# Altium PCB 175-00002 rev 2, PCB, Sinistro Clock Gen.PcbDoc (part 2 of 6)
Units mil, origin at the board's own origin, x right, y up, seen from the top; angles counter-clockwise.
Board outline 5905.51 x 4330.71 mil, 10 copper layers (Top Layer (.GTL), MidLayer1 (*.G1), +12V (*.GP1), -12V (*.GP2), A & GND (*.GP3), Chassis E (*.GP4), +28V & VCC (*.GP5), MidLayer2 (*.G2), MidLayer3 (*.G3), Bottom Layer (.GBL)), stack 64.6 mil thick; 495 components, 327 nets, 1939 pads, 938 vias.
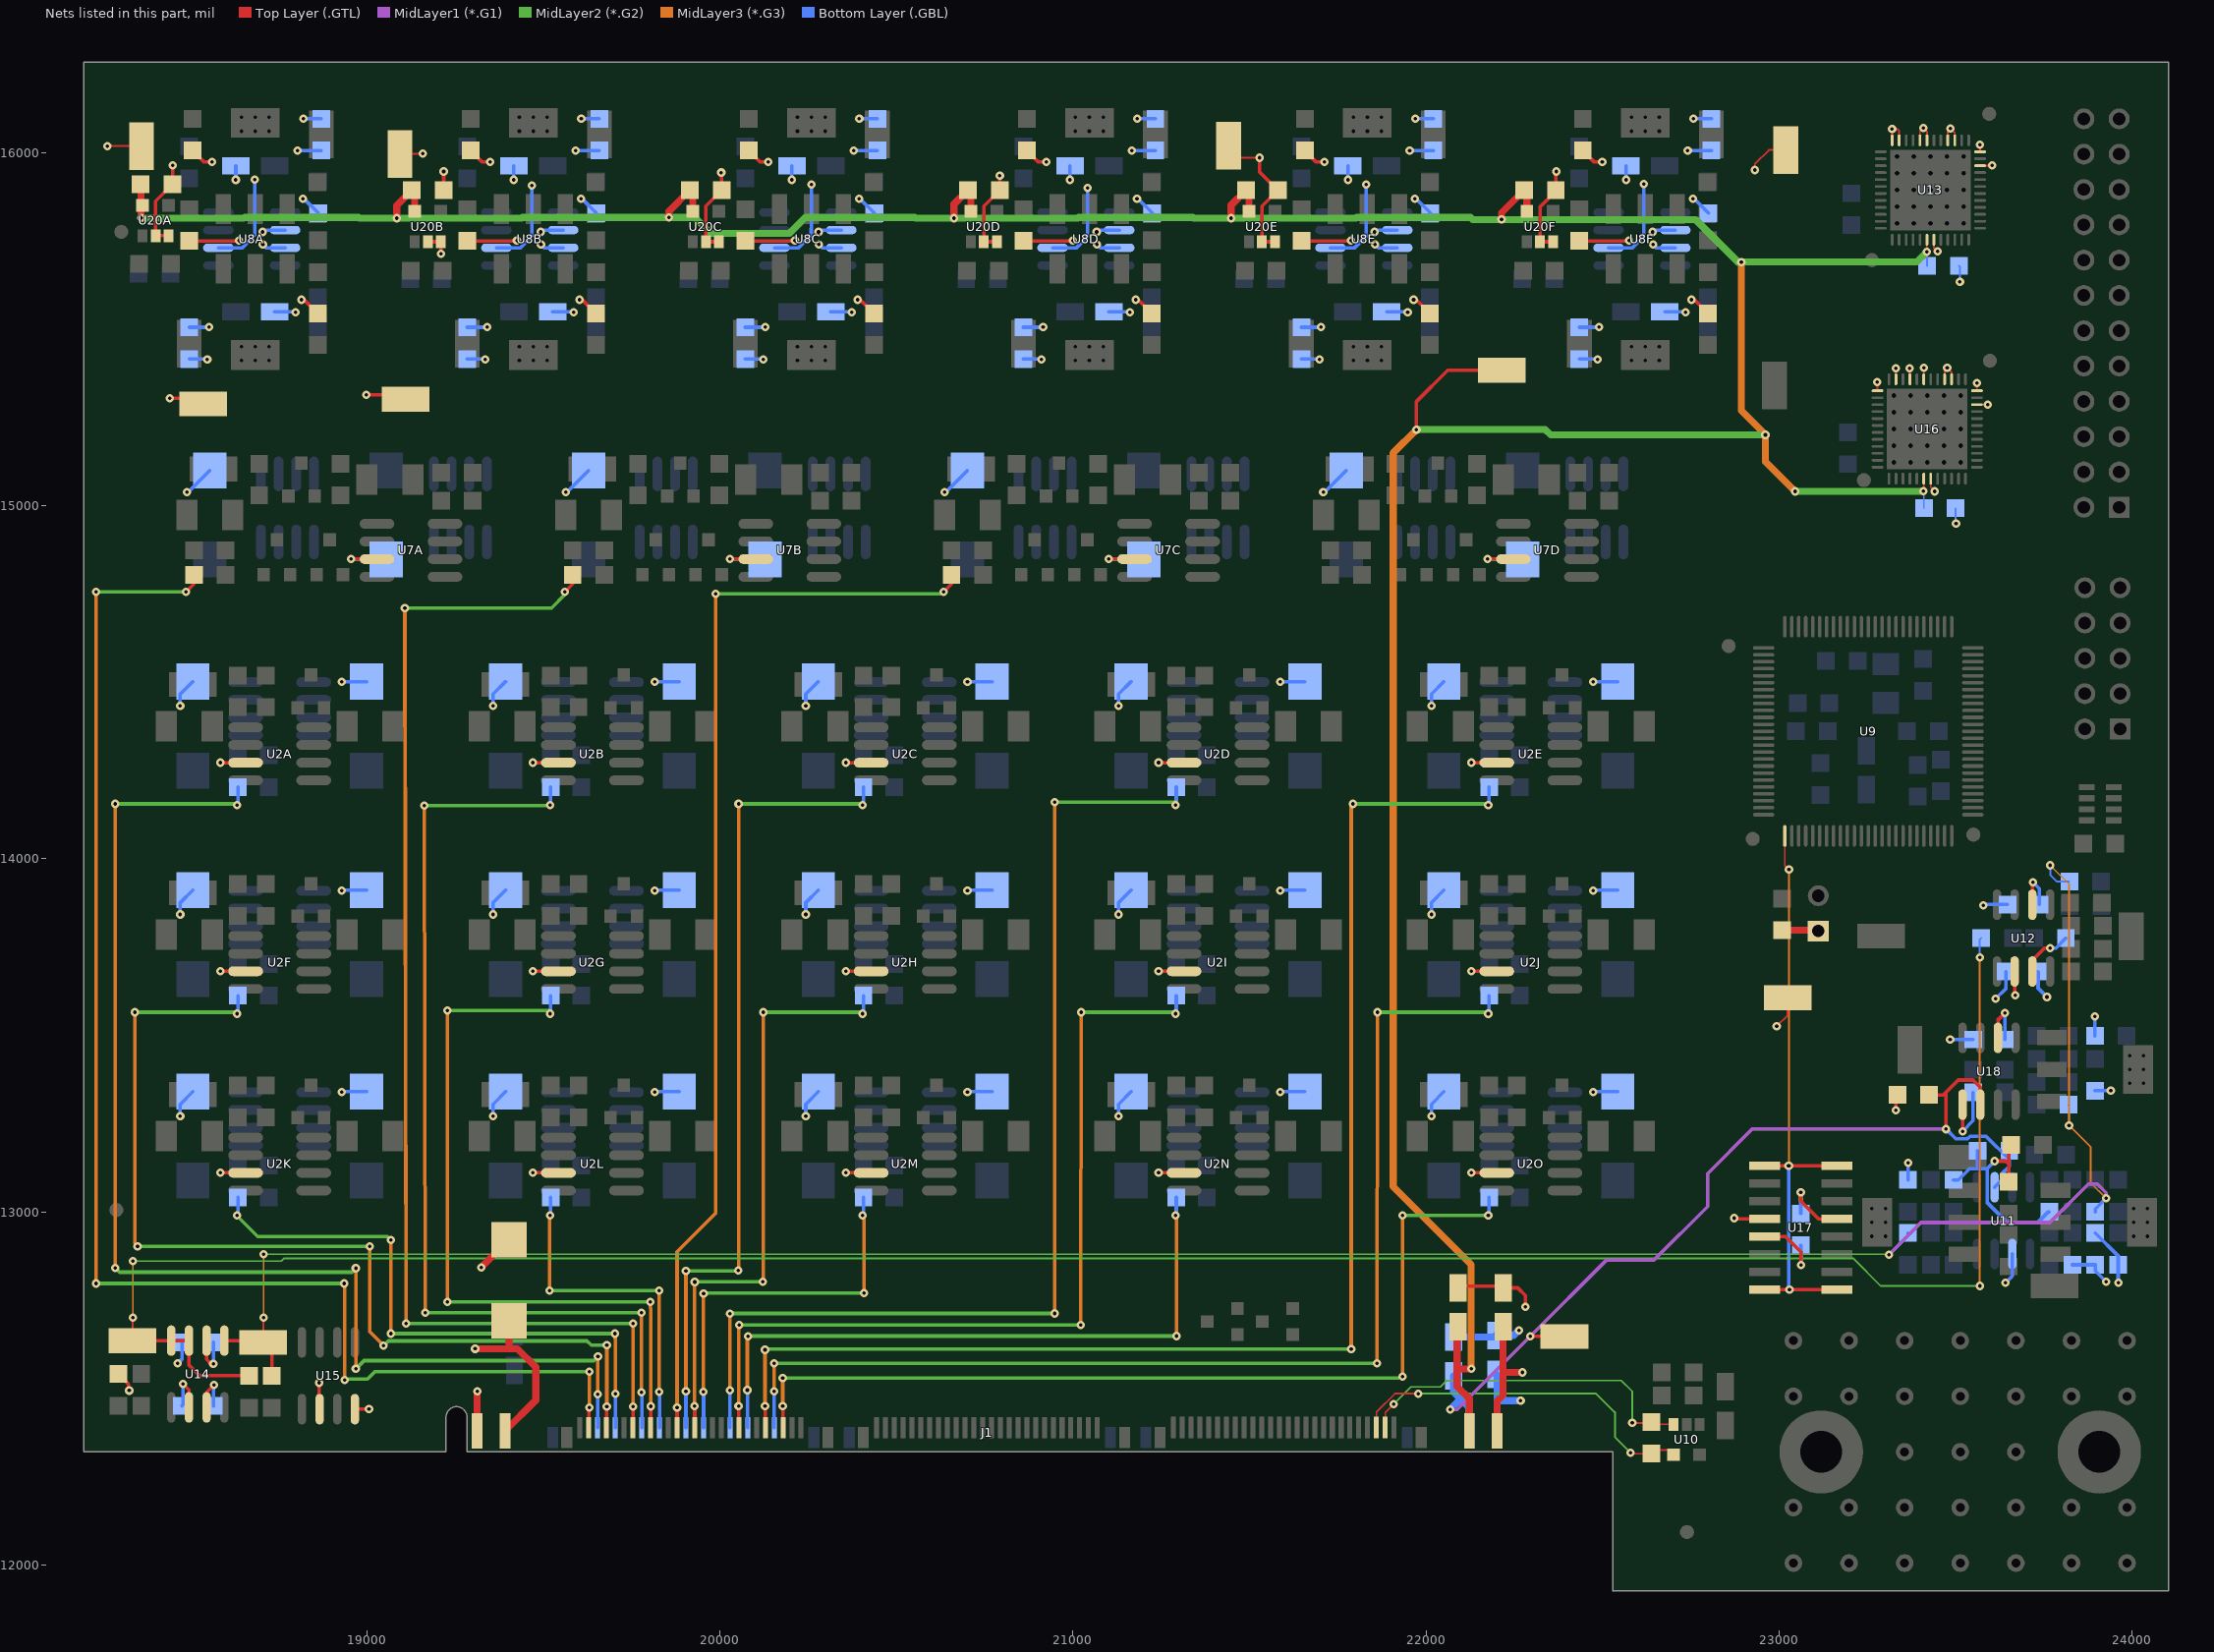
[diagram p10: the nets of this part, all layers, seen from the top]

## Components (designator, comment, footprint, x,y, rotation, side; value= is the part's Value field where it differs from the comment) (continued)
U8F "LT1124CS8" S8_N 22611.46,15755.04 r180 bottom (schematic designator U8)
U9 "EPM240T100C3" TQFP100_L 23252.41,14360.63 r0 top
U10 "FIN1002M5" SMD_SOT23_5 22738,12355 r0 top
U11 "LT1124CS8" S8_N 23635.21,12974.92 r270 bottom
U12 "LT1124CS8" S8_N 23692,13775 r90 top
U13 "MAX1258" QFN48_M 23334,15799 r0 top
U14 "LT1124CS8" S8_N 18521.46,12540.51 r90 top
U15 "REF02AU" 182H_N 18891.46,12535.51 r90 top
U16 "MAX1258" QFN48_M 23325,15122.26 r0 top
U17 "DG202" SOIC16 23061.31,12955 r270 top
U18 "LT1124CS8" S8_N 23594.46,13397.84 r90 top
U19 "DS2411" SMD_SOT23_3 21423,12689 r90 top
U20A "AD8605" SMD_SOT23_5 18402,15807 r180 top (schematic designator U20)
U20B "AD8605" SMD_SOT23_5 19173,15790 r180 top (schematic designator U20)
U20C "AD8605" SMD_SOT23_5 19960.4,15790 r180 top (schematic designator U20)
U20D "AD8605" SMD_SOT23_5 20747.8,15790 r180 top (schematic designator U20)
U20E "AD8605" SMD_SOT23_5 21535.2,15790 r180 top (schematic designator U20)
U20F "AD8605" SMD_SOT23_5 22322.61,15790 r180 top (schematic designator U20)

## Footprints (in the part's own frame and the unit in brackets; to place one, negate y for a bottom-side part, rotate by r counter-clockwise, add the part's x,y. Pads: shape width x height; smd on the part's side, far side on the other; paste and mask are expansions set on the pad)
182H_M [mm] "8-Pin Small Outline Integrated Circuit 1.27 mm Pitch, IPC Low Density"
  oval 2.5x0.7 smd: 1(-2.45,1.905) 2(-2.45,0.635) 3(-2.45,-0.635) 4(-2.45,-1.905) 5(2.45,-1.905) 6(2.45,-0.635) 7(2.45,0.635) 8(2.45,1.905)
  silkscreen extent -2.57,-2.5 0.8,2.93, body extent -2,-2.5 2,2.5, height 1.75
182H_N [mm] "8-Pin Small Outline Integrated Circuit 1.27 mm Pitch, IPC Medium Density"
  oval 2.2x0.6 smd: 1(-2.4,1.905) 2(-2.4,0.635) 3(-2.4,-0.635) 4(-2.4,-1.905) 5(2.4,-1.905) 6(2.4,-0.635) 7(2.4,0.635) 8(2.4,1.905)
  silkscreen extent -2.52,-2.5 0.9,2.88, body extent -1.95,-2.45 1.95,2.45, height 1.75
HDR1X2 [mm] "Connector; Header; 2 Position"
  rect 1.5x1.5 hole 0.9: 1(0,0)
  round 1.5 hole 0.9: 2(2.54,0)
  silkscreen extent -1.27,-1.27 3.81,1.27
HDR2X5 [mm] "Connector; Header; 5x2 Position"
  rect 1.5x1.5 hole 0.9: 1(0,0)
  round 1.5 hole 0.9: 2(0,2.54) 3(2.54,0) 4(2.54,2.54) 5(5.08,0) 6(5.08,2.54) 7(7.62,0) 8(7.62,2.54) 9(10.16,0) 10(10.16,2.54)
  silkscreen extent -1.27,-1.27 11.43,3.81
HDR2X12 [mm] "Connector; Header; 12x2 Position"
  rect 1.5x1.5 hole 0.9: 1(0,0)
  round 1.5 hole 0.9: 2(0,2.54) 3(2.54,0) 4(2.54,2.54) 5(5.08,0) 6(5.08,2.54) 7(7.62,0) 8(7.62,2.54) 9(10.16,0) 10(10.16,2.54) 11(12.7,0) 12(12.7,2.54) 13(15.24,0) 14(15.24,2.54) 15(17.78,0) 16(17.78,2.54) 17(20.32,0) 18(20.32,2.54) 19(22.86,0) 20(22.86,2.54) 21(25.4,0) 22(25.4,2.54) 23(27.94,0) 24(27.94,2.54)
  silkscreen extent -1.27,-1.27 29.21,3.81
QFN48_M [mm] "QFN, 48-Leads, Body 7x7mm, Pitch 0.5mm, IPC Low Density"
  round 0.66 hole 0.33 mask+0: 0(0,0)
  round 0.66 hole 0.33: 0(0,1.2) 0(0,3.6) 0(0,4.8) 0(1.2,0) 0(1.2,1.2) 0(1.2,2.4) 0(1.2,4.8) 0(2.4,0) 0(2.4,1.2) 0(2.4,2.4) 0(2.4,3.6) 0(2.4,4.8) 0(3.6,0) 0(3.6,1.2) 0(3.6,2.4) 0(3.6,3.6) 0(3.6,4.8) 0(4.8,0) 0(4.8,1.2) 0(4.8,2.4) 0(4.8,3.6) 0(4.8,4.8)
  round 0.66 hole 0.33 paste+0 mask+0: 0(0,2.4) 0(1.2,3.6)
  rect 5.8x5.8 smd: 0(2.4,2.4)
  oval 0.85x0.2 smd: 1(-1.175,5.15) 2(-1.175,4.65) 3(-1.175,4.15) 4(-1.175,3.65) 5(-1.175,3.15) 6(-1.175,2.65) 7(-1.175,2.15) 8(-1.175,1.65) 9(-1.175,1.15) 10(-1.175,0.65) 11(-1.175,0.15) 12(-1.175,-0.35) 25(5.975,-0.35) 26(5.975,0.15) 27(5.975,0.65) 28(5.975,1.15) 29(5.975,1.65) 30(5.975,2.15) 31(5.975,2.65) 32(5.975,3.15) 33(5.975,3.65) 34(5.975,4.15) 35(5.975,4.65) 36(5.975,5.15)
  oval 0.2x0.85 smd: 13(-0.35,-1.175) 14(0.15,-1.175) 15(0.65,-1.175) 16(1.15,-1.175) 17(1.65,-1.175) 18(2.15,-1.175) 19(2.65,-1.175) 20(3.15,-1.175) 21(3.65,-1.175) 22(4.15,-1.175) 23(4.65,-1.175) 24(5.15,-1.175) 37(5.15,5.975) 38(4.65,5.975) 39(4.15,5.975) 40(3.65,5.975) 41(3.15,5.975) 42(2.65,5.975) 43(2.15,5.975) 44(1.65,5.975) 45(1.15,5.975) 46(0.65,5.975) 47(0.15,5.975) 48(-0.35,5.975)
  silkscreen extent -2.27,-1.2 6,6, body extent -1.17,-1.18 5.97,5.97, height 0.9
"QMS EDGE PWR PINS" [mil] "78 pos (156 pin) + 8 pwr pins"
  rect 60x14 smd mask+0: 0(69.15,-552.45) 1(69.15,-1152.45) 3(69.15,-1127.45) 5(69.15,-1102.45) 7(69.15,-1077.45) 9(69.15,-1052.45) 11(69.15,-1027.45) 13(69.15,-1002.45) 15(69.15,-977.45) 17(69.15,-952.45) 19(69.15,-927.45) 21(69.15,-902.45) 23(69.15,-877.45) 25(69.15,-852.45) 27(69.15,-827.45) 29(69.15,-802.45) 31(69.15,-777.45) 33(69.15,-752.45) 35(69.15,-727.45) 37(69.15,-702.45) 39(69.15,-677.45) 41(69.15,-652.45) 43(69.15,-627.45) 45(69.15,-602.45) 47(69.15,-577.45) 51(69.15,-527.45) 53(68.09,-312.11) 55(68.09,-287.11) 57(68.09,-262.11) 59(68.09,-237.11) 61(68.09,-212.11) 63(68.09,-187.11) 65(68.09,-162.11) 67(68.09,-137.11) 69(68.09,-112.11) 71(68.09,-87.11) 73(68.09,-62.11) 75(68.09,-37.11) 77(68.09,-12.11) 79(68.09,12.89) 81(68.09,37.89) 83(68.09,62.89) 85(68.09,87.89) 87(68.09,112.89) 89(68.09,137.89) 91(68.09,162.89) 93(68.09,187.89) 95(68.09,212.89) 97(68.09,237.89) 99(68.09,262.89) 101(68.09,287.89) 103(68.09,312.89) 105(68.09,528.05) 107(68.09,553.05) 109(68.09,578.05) 111(68.09,603.05) 113(68.09,628.05) 115(68.09,653.05) 117(68.09,678.05) 119(68.09,703.05) 121(68.09,728.05) 123(68.09,753.05) 125(68.09,778.05) 127(68.09,803.05) 129(68.09,828.05) 131(68.09,853.05) 133(68.09,878.05) 135(68.09,903.05) 137(68.09,928.05) 139(68.09,953.05) 141(68.09,978.05) 143(68.09,1003.05) 145(68.09,1028.05) 147(68.09,1053.05) 149(68.09,1078.05) 151(68.09,1103.05) 153(68.09,1128.05) 155(68.09,1153.05)
  rect 60x14 smd far side mask+0: 2(69.15,-1152.45) 4(69.15,-1127.45) 6(69.15,-1102.45) 8(69.15,-1077.45) 10(69.15,-1052.45) 12(69.15,-1027.45) 14(69.15,-1002.45) 16(69.15,-977.45) 18(69.15,-952.45) 20(69.15,-927.45) 22(69.15,-902.45) 24(69.15,-877.45) 26(69.15,-852.45) 28(69.15,-827.45) 30(69.15,-802.45) 32(69.15,-777.45) 34(69.15,-752.45) 36(69.15,-727.45) 38(69.15,-702.45) 40(69.15,-677.45) 42(69.15,-652.45) 44(69.15,-627.45) 46(69.15,-602.45) 48(69.15,-577.45) 50(69.15,-552.45) 52(69.15,-527.45) 54(68.09,-312.11) 56(68.09,-287.11) 58(68.09,-262.11) 60(68.09,-237.11) 62(68.09,-212.11) 64(68.09,-187.11) 66(68.09,-162.11) 68(68.09,-137.11) 70(68.09,-112.11) 72(68.09,-87.11) 74(68.09,-62.11) 76(68.09,-37.11) 78(68.09,-12.11) 80(68.09,12.89) 82(68.09,37.89) 84(68.09,62.89) 86(68.09,87.89) 88(68.09,112.89) 90(68.09,137.89) 92(68.09,162.89) 94(68.09,187.89) 96(68.09,212.89) 98(68.09,237.89) 100(68.09,262.89) 102(68.09,287.89) 104(68.09,312.89) 106(68.09,528.05) 108(68.09,553.05) 110(68.09,578.05) 112(68.09,603.05) 114(68.09,628.05) 116(68.09,653.05) 118(68.09,678.05) 120(68.09,703.05) 122(68.09,728.05) 124(68.09,753.05) 126(68.09,778.05) 128(68.09,803.05) 130(68.09,828.05) 132(68.09,853.05) 134(68.09,878.05) 136(68.09,903.05) 138(68.09,928.05) 140(68.09,953.05) 142(68.09,978.05) 144(68.09,1003.05) 146(68.09,1028.05) 148(68.09,1053.05) 150(68.09,1078.05) 152(68.09,1103.05) 154(68.09,1128.05) 156(68.09,1153.05)
  rect 60x31 smd mask+0: 157(41.09,-1229.45) 159(41.09,-489.45) 161(41.09,-389.45) 163(41.09,350.55) 165(41.09,450.55) 167(41.09,1190.55)
  rect 60x31 smd far side mask+0: 158(41.09,-1189.45) 160(41.09,-449.45) 162(41.09,-349.45) 164(41.09,390.55) 166(41.09,490.55) 168(41.09,1230.55)
  rect 100x30 smd mask+0: PC01(59.65,-1444.45) PC03(59.65,-1365.55) PC05(59.15,1365.55) PC07(59.15,1444.45)
  rect 100x30 smd far side mask+0: PC02(59.65,-1444.45) PC04(59.65,-1365.55) PC06(59.15,1365.55) PC08(59.15,1444.45)
  silkscreen extent -373,-1649 217,1647
"RES ARRAY 0603 x 4" [mm]
  rect 0.44x1.15 smd: 1(0,0.1) 2(0,2.05) 3(0.8,0.1) 4(0.8,2.05) 5(1.6,0.1) 6(1.6,2.05) 7(2.4,0.1) 8(2.4,2.05)
  silkscreen extent -0.6,-0.6 3,1.8
S8_N [mm] "SOIC, 8-Leads, Body 4.9x3.9mm, Pitch 1.27mm, IPC Medium Density"
  oval 2.2x0.6 smd: 1(-2.4,1.905) 2(-2.4,0.635) 3(-2.4,-0.635) 4(-2.4,-1.905) 5(2.4,-1.905) 6(2.4,-0.635) 7(2.4,0.635) 8(2.4,1.905)
  silkscreen extent -2.53,-2.5 0.9,2.88, body extent -1.95,-2.45 1.95,2.45, height 1.76
SMD_0805 [mil]
  rect 50x50 smd: 1(-45,0) 2(45,0)
  silkscreen extent -1,-1 1,1
SMD_1206 [mil]
  rect 63x75 smd: 1(-55,0) 2(55,0)
SMD_1210_INDUCT [mil]
  rect 60x86 smd: 1(-65,0) 2(65,0)
  silkscreen extent -73,-62 73,62
SMD_CAP_3216 [mil]
  rect 78x48 smd: 1(55,0) 2(-55,0)
  silkscreen extent -108,-65 134,38
SMD_CAP_6032 [mil]
  rect 100x100 smd: NEG(-115,0) POS(115,0)
  silkscreen extent -179,-110 195,64
SMD_CAP_7343 [mil]
  rect 102x94 smd: NEG(-126,0) POS(126,0)
  silkscreen extent -145,-80 220,80
SMD_SOT23_3 [mil]
  rect 36x36 smd: 1(-37,-43) 2(37,-43) 3(0,43)
  silkscreen extent -57,-25 57,25
SMD_SOT23_5 [mil]
  rect 28x36 smd: 1(37,43) 2(0,43) 3(-37,43)
  rect 36x36 smd: 4(-37,-43) 5(37,-43)
  silkscreen extent -57,-25 57,85
"SMD_TEST POINT" [mil] "Keystone 5015"
  rect 135x70 smd: 1(0,0)
SOIC16 [mm] "Small Outline; 16 Leads; Body Width 3.9 mm; Pitch 1.27 mm"
  rect 0.6x2.2 smd: 1(-4.445,-2.6) 2(-3.175,-2.6) 3(-1.905,-2.6) 4(-0.635,-2.6) 5(0.635,-2.6) 6(1.905,-2.6) 7(3.175,-2.6) 8(4.445,-2.6) 9(4.445,2.6) 10(3.175,2.6) 11(1.905,2.6) 12(0.635,2.6) 13(-0.635,2.6) 14(-1.905,2.6) 15(-3.175,2.6) 16(-4.445,2.6)
  silkscreen extent -5.42,-2.72 5,1.1
SOT23A [mm] "SOT-23; 3 Leads; Body 3.0 x 2.5 mm, inc. leads (LxW max)"
  rect 0.9x0.95 smd: 1(-0.95,-1.175) 2(0.95,-1.175) 3(0,1.175)
  silkscreen extent -2.07,-1.3 1.3,1.17
"SOT223 w/PowerPAD" [mm] "SOT-223/SC-73; 4 Leads; Body 6.7 x 7.3 mm, inc. leads (LxW max)"
  rect 1.1x2.15 smd: 1(-2.3,-3.1) 2(0,-3.1) 3(2.3,-3.1)
  round 0.508 hole 0.254: 4(-1,2.5) 4(-1,3.5) 4(0,2.5) 4(0,3.5) 4(1,2.5) 4(1,3.5)
  rect 3.5x2.15 smd: 4(0,3.1)
  silkscreen extent -3.35,-4.85 3.35,1.62
SOT-23 [mm] "SOT-23; 3 Leads; Body 3.0 x 2.6 mm, inc. leads (LxW max)"
  rect 0.9x0.95 smd: 1(-0.95,-1.25) 2(0.95,-1.25) 3(0,1.25)
  silkscreen extent -2.07,-1.37 1.3,1.25
TQFP100_L [mm] "Thin QFP, 100-Leads, Body 14x14mm, Pitch 0.5mm, IPC High Density"
  oval 1.55x0.25 smd: 1(-7.525,6) 2(-7.525,5.5) 3(-7.525,5) 4(-7.525,4.5) 5(-7.525,4) 6(-7.525,3.5) 7(-7.525,3) 8(-7.525,2.5) 9(-7.525,2) 10(-7.525,1.5) 11(-7.525,1) 12(-7.525,0.5) 13(-7.525,0) 14(-7.525,-0.5) 15(-7.525,-1) 16(-7.525,-1.5) 17(-7.525,-2) 18(-7.525,-2.5) 19(-7.525,-3) 20(-7.525,-3.5) 21(-7.525,-4) 22(-7.525,-4.5) 23(-7.525,-5) 24(-7.525,-5.5) 25(-7.525,-6) 51(7.525,-6) 52(7.525,-5.5) 53(7.525,-5) 54(7.525,-4.5) 55(7.525,-4) 56(7.525,-3.5) 57(7.525,-3) 58(7.525,-2.5) 59(7.525,-2) 60(7.525,-1.5) 61(7.525,-1) 62(7.525,-0.5) 63(7.525,0) 64(7.525,0.5) 65(7.525,1) 66(7.525,1.5) 67(7.525,2) 68(7.525,2.5) 69(7.525,3) 70(7.525,3.5) 71(7.525,4) 72(7.525,4.5) 73(7.525,5) 74(7.525,5.5) 75(7.525,6)
  oval 0.25x1.55 smd: 26(-6,-7.525) 27(-5.5,-7.525) 28(-5,-7.525) 29(-4.5,-7.525) 30(-4,-7.525) 31(-3.5,-7.525) 32(-3,-7.525) 33(-2.5,-7.525) 34(-2,-7.525) 35(-1.5,-7.525) 36(-1,-7.525) 37(-0.5,-7.525) 38(0,-7.525) 39(0.5,-7.525) 40(1,-7.525) 41(1.5,-7.525) 42(2,-7.525) 43(2.5,-7.525) 44(3,-7.525) 45(3.5,-7.525) 46(4,-7.525) 47(4.5,-7.525) 48(5,-7.525) 49(5.5,-7.525) 50(6,-7.525) 76(6,7.525) 77(5.5,7.525) 78(5,7.525) 79(4.5,7.525) 80(4,7.525) 81(3.5,7.525) 82(3,7.525) 83(2.5,7.525) 84(2,7.525) 85(1.5,7.525) 86(1,7.525) 87(0.5,7.525) 88(0,7.525) 89(-0.5,7.525) 90(-1,7.525) 91(-1.5,7.525) 92(-2,7.525) 93(-2.5,7.525) 94(-3,7.525) 95(-3.5,7.525) 96(-4,7.525) 97(-4.5,7.525) 98(-5,7.525) 99(-5.5,7.525) 100(-6,7.525)
  silkscreen extent -7.65,-6.35 6.35,6.8, body extent -7,-7 7,7, height 1.2

## Part data
C1A C1B C1C C1D C1E C1F C1G C1H C1I C1J C1K C1L C1M C1N C1O C3A C3B C3C C3D C3E C3F C3G C3H C3I C3J C3K C3L C3M C3N C3O C5A C5B C5C C5D C8A C8B C8C C8D C59: library part "Cap Tant 35V", "outline 6.0mm x 3.2mm"
C2A C2B C2C C2D C2E C2F C2G C2H C2I C2J C2K C2L C2M C2N C2O C4A C4B C4C C4D C4E C4F C4G C4H C4I C4J C4K C4L C4M C4N C4O C6A C6B C6C C6D C9A C9B C9C C9D C9E C9F C10A C10B C10C C10D C10E C10F C11A C11B C11C C11D C11E C11F C12 C15A C15B C15C C15D C15E C15F C16 C17 C18 C19 C20 C21 C22 C23 C24 C25 C26 C27 C28 C29 C30 C31 C33 C34 C35 C36 C37A C37B C37C C37D C38 C39 C40 C41 C42 C43 C44A C44B C44C C44D C44E C44F C45 C46 C47 C56: "Capacitor"
C7 C13A C13B C13C C13D C13E C13F C14A C14B C14C C14D C14E C14F C32 C53 C54 C55 C57 C58: library part "Cap Tant 15V", "outline 3.2mm x 1.6mm"
D1A D1B D1C D1D D2A D2B D2C D2D: "Silicon Switching Diode for High-Speed Switching"
J1: "SAMTEC QMSS EDGE W/PWR PINS"
L5: library part INDUCTOR1
P1: "Header, 5-Pin, Dual row"
P2: "Header, 2-Pin"
P3: "Header, 12-Pin, Dual row"
Q1A Q1B Q1C Q1D Q1E Q1F Q3 Q4 Q5: "NPN 40V 3A 2W"
Q2A Q2B Q2C Q2D Q2E Q2F: "PNP 40V 3A 2W"
Q6: "P-MOSFET LOGIC LEVEL"
R1A R1B R1C R1D R1E R1F R1G R1H R1I R1J R1K R1L R1M R1N R1O R2A R2B R2C R2D R2E R2F R2G R2H R2I R2J R2K R2L R2M R2N R2O R3A R3B R3C R3D R4A R4B R4C R4D R5A R5B R5C R5D R6A R6B R6C R6D R7A R7B R7C R7D R7E R7F R8A R8B R8C R8D R8E R8F R9A R9B R9C R9D R9E R9F R10A R10B R10C R10D R10E R10F R11 R12A R12B R12C R12D R12E R12F R13A R13B R13C R13D R13E R13F R14A R14B R14C R14D R14E R14F R15 R16 R17A R17B R17C R17D R17E R17F R18 R19 R20A R20B R20C R20D R20E R20F R21 R22 R23A R23B R23C R23D R23E R23F R24 R25 R27 R28 R29 R30 R31 R32 R33 R34 R35 R37 R39 R40 R41 R42 R43 R44 R45 R46 R47: "Resistor"
R26 R36 R38 R48: library part "Res SMD", "Resistor 0805"
RN1: "Resistor Array 4 Isolated"
TP1A TP1B TP1C TP1D TP1E TP1F TP2A TP2B TP2C TP2D TP2E TP2F TP3A TP3B TP3C TP3D TP3E TP3F TP3G TP3H TP3I TP3J TP3K TP3L TP3M TP3N TP3O TP4A TP4B TP4C TP4D TP5 TP6 TP7 TP8 TP9 TP10 TP11 TP12 TP13 TP14 TP15 TP16 TP17 TP18 TP19 TP20 TP21: "SMD loop test point"
U1A U1B U1C U1D U1E U1F U1G U1H U1I U1J U1K U1L U1M U1N U1O U4A U4B U4C U4D: "3-Terminal Positive Regulator"
U2A U2B U2C U2D U2E U2F U2G U2H U2I U2J U2K U2L U2M U2N U2O U5A U5B U5C U5D U7A U7B U7C U7D: "CMOS Optocoupler"
U3A U3B U3C U3D U3E U3F U3G U3H U3I U3J U3K U3L U3M U3N U3O U6A U6B U6C U6D: "MOSFET driver non-inverting"
U8A U8B U8C U8D U8E U8F U11 U12 U14 U18: "Dual Low Noise, High-Speed Precision Operational Amplifier"
U9: "MAX II 3.3/2.5V CPLD, 80 IOs, 240 Logic Elements, 100-Pin Plastic TQFP, Commercial Temperature, Speed Grade 3"
U13 U16: "12-Bit MultChan ADC/DAC"
U15: "+5V Precision Voltage Reference"
U17: "DG202 SPST N.O."
U19: "Silicon Serial Number"
U20A U20B U20C U20D U20E U20F: "CMOS, Rail-to-Rail Opamp"

## Free pads (board coordinates)
  round 50 hole 25: 0(23040.52,12005.04) 0(23040.52,12162.52) 0(23040.52,12477.48) 0(23040.52,12634.96) 0(23198,12005.04) 0(23198,12162.52) 0(23198,12477.48) 0(23198,12634.96) 1(23355.48,12005.04) 1(23355.48,12162.52) 1(23355.48,12320) 1(23355.48,12477.48) 1(23355.48,12634.96) 2(23512.96,12005.04) 2(23512.96,12162.52) 2(23512.96,12320) 2(23512.96,12477.48) 2(23512.96,12634.96) 3(23670.44,12005.04) 3(23670.44,12162.52) 3(23670.44,12320) 3(23670.44,12477.48) 3(23670.44,12634.96) 4(23827.92,12005.04) 4(23827.92,12162.52) 4(23827.92,12477.48) 4(23827.92,12634.96) 5(23985.4,12005.04) 5(23985.4,12162.52) 5(23985.4,12477.48) 5(23985.4,12634.96)
  round 236.22 hole 118.11: 0(23119.26,12320) 1(23906.66,12320)
  round 40 smd mask+40: ""(18291,13005) ""(18305,15775) ""(22739,12093)
  round 40 smd mask+20: ""(22857,14602) ""(22925,14056) ""(23240,15072) ""(23263,15695) ""(23550,14068) ""(23595,16109) ""(23597,15410)

## Via types
v1: diameter 24, hole 10, Top Layer (.GTL) to Bottom Layer (.GBL), 938 vias

## Nets (pads, with @x,y where several pads share a name; then routed paths per layer and width w, separated by ;. In a path a pad name is that pad's centre, name@x,y a point inside that pad or via, vN(x,y) a via of type N, cw(c..) or ccw(c..) an arc to the next point about the centre after c; other vN are vias at no path point)
+5ANA: C33.2 C35.2 C44A.1 C44B.1 C44C.1 C44D.1 C44E.1 C44F.1 C58.1 J1.PC03 TP17.1 U13.18 U16.18 U20A.5 U20B.5 U20C.5 U20D.5 U20E.5 U20F.5 | length 11795.5
  Top Layer (.GTL) w5: v1(23409,15040.26) 23409.65,15040.91 U16.18@23409.65,15076 ; v1(23418,15718) 23418,15752.09 U13.18@23418.65,15752.74
  Top Layer (.GTL) w10: v1(21973,15215) 21973,15294.49 22061.51,15383 TP17.1@22215,15383
  Top Layer (.GTL) w20: C44A.1@18360,15910 18361,15909 v1(18361,15814) ; v1(19085,15813.69) 19085,15850 C44B.1@19128,15893 19136,15885 U20B.5@19136,15833 ; v1(19856,15816) 19856,15833.6 C44C.1@19915.4,15893 19923.4,15885 U20C.5@19923.4,15833 ; v1(20663,15813.69) 20663,15853.2 C44D.1@20702.8,15893 20710.8,15885 U20D.5@20710.8,15833 ; v1(21448,15813.69) 21448,15850.8 C44E.1@21490.2,15893 21498.2,15885 U20E.5@21498.2,15833 ; C58.1@22088,12674.37 22088,12555 ; J1.PC03@22122.6,12379.65 22122.6,12470.4 22088,12505 22088,12555 ; v1(22128,12555) 22088,12555 ; v1(22214,15810) 22214,15829.39 C44F.1@22277.61,15893 22285.61,15885 U20F.5@22285.61,15833
  MidLayer2 (*.G2) w20: v1(18361,15814) 18361.31,15813.69 18651.76,15813.69 18654.08,15816 18976.77,15816 18979.08,15813.69 v1(19085,15813.69) 19439.16,15813.69 19441.48,15816 v1(19856,15816) 19929,15816 19974.26,15770.74 20196.69,15770.74 20241.96,15816 20551.57,15816 20553.89,15813.69 v1(20663,15813.69) 21013.97,15813.69 21016.07,15815.78 21339.17,15815.78 21341.26,15813.69 v1(21448,15813.69) 21801.37,15813.69 21803.47,15815.78 22126.57,15815.78 22132.35,15810 v1(22214,15810) 22762.88,15810 22883.88,15689 v1(22893,15689) 22894,15690 23390,15690 v1(23418,15718) ; v1(21973,15215) 22338,15215 22353,15200 v1(22961,15200) v1(22961,15201) ; v1(23045,15040) 23408.74,15040 v1(23409,15040.26)
  MidLayer3 (*.G3) w20: v1(21973,15215) 21907,15149 21907,13071 22128,12850 v1(22128,12555) ; v1(22893,15689) 22893,15269 v1(22961,15201) v1(22961,15200) 22961,15124 v1(23045,15040)
  Bottom Layer (.GBL) w5: v1(23409,15040.26) 23410,15039.26 C35.2@23410,14992.26 ; v1(23418,15718) 23419,15717 C33.2@23419,15679
+5VREF: R24.1 R46.1 TP9.1 U14.7 U14.8 | length 6888.6
  Top Layer (.GTL) w5: TP9.1@18336.96,12635 18336.96,12698.96 v1(18338,12700)
  Top Layer (.GTL) w10: TP9.1@18336.96,12635 U14.8@18446.47,12635 U14.7@18496.47,12635 18496.47,12565.74 18526.69,12535.51 R46.1@18666.47,12535.51
  MidLayer2 (*.G2) w5: v1(18338,12860) 18758,12860 18765.5,12867.5 23210.5,12867.5 23288,12790 v1(23568,12790)
  MidLayer3 (*.G3) w5: v1(18338,12700) v1(18338,12860) ; v1(23568,12790) v1(23568,13720)
  Bottom Layer (.GBL) w5: v1(23568,13720) 23568,13771 R24.1@23572,13775
+12V: C9A.1 C9B.1 C9C.1 C9D.1 C9E.1 C9F.1 C25.1 C41.1 C57.1 J1.PC01 R12A.2 R12B.2 R12C.2 R12D.2 R12E.2 R12F.2 TP16.1 U8A.6 U8B.6 U8C.6 U8D.6 U8E.6 U8F.6 U12.6 U14.6 U15.2 | length 3098.9
  Top Layer (.GTL) w10: v1(18442,15304) 18521,15304 TP16.1@18537,15288 ; R12A.2@18507.13,16005.32 18539.89,15972.56 18561.27,15972.56 v1(18562.25,15973.54) ; U14.6@18546.47,12635 18546.47,12581.74 18558.46,12569.74 v1(18565.46,12569.74) ; v1(18865.46,12515.74) 18865.46,12442.02 U15.2@18866.46,12441.02 ; R12B.2@19294.54,16005.32 19327.29,15972.56 19348.67,15972.56 v1(19349.65,15973.54) ; R12C.2@20081.94,16005.32 20114.69,15972.56 20136.07,15972.56 v1(20137.06,15973.54) ; R12D.2@20869.34,16005.32 20902.09,15972.56 20923.47,15972.56 v1(20924.46,15973.54) ; R12E.2@21656.74,16005.32 21689.5,15972.56 21710.87,15972.56 v1(21711.86,15973.54) ; R12F.2@22444.14,16005.32 22476.9,15972.56 22498.27,15972.56 v1(22499.26,15973.54) ; U12.6@23717,13869.49 23717,13931.77 v1(23718.46,13933.23)
  Top Layer (.GTL) w20: J1.PC01@22201.5,12379.65 22201.5,12463.5 22218,12480 22218,12545 ; C57.1@22218,12674.37 22218,12545 ; v1(22273,12545) 22218,12545
  Bottom Layer (.GBL) w10: v1(18565.46,12569.74) 18566.46,12570.74 C41.1@18566.46,12630.51 ; U8A.6@18579.97,15730.04 18580.89,15729.12 18631.48,15729.12 18646.74,15729.12 18683,15765.38 v1(18683,15923) ; v1(18820.21,16095.53) 18820.4,16095.32 C9A.1@18871.31,16095.32 ; U8B.6@19367.37,15730.04 19368.29,15729.12 19418.88,15729.12 19434.14,15729.12 19468,15762.98 v1(19468,15906) ; v1(19607.61,16095.53) 19607.81,16095.32 C9B.1@19658.71,16095.32 ; U8C.6@20154.77,15730.04 20155.69,15729.12 20206.28,15729.12 20221.54,15729.12 20258.77,15766.35 20258.77,15783.42 20259,15783.65 v1(20259,15909) ; v1(20395.02,16095.53) 20395.21,16095.32 C9C.1@20446.11,16095.32 ; U8D.6@20942.17,15730.04 20943.09,15729.12 20993.69,15729.12 21008.94,15729.12 21041,15761.18 v1(21041,15899) ; v1(21182.42,16095.53) 21182.61,16095.32 C9D.1@21233.51,16095.32 ; U8E.6@21729.58,15730.04 21730.5,15729.12 21781.09,15729.12 21796.34,15729.12 21831,15763.77 v1(21831,15909) ; v1(21969.82,16095.53) 21970.01,16095.32 C9E.1@22020.91,16095.32 ; U8F.6@22516.97,15730.04 22517.9,15729.12 22568.49,15729.12 22583.75,15729.12 22617,15762.37 v1(22617,15910) ; v1(22757.22,16095.53) 22757.41,16095.32 C9F.1@22808.31,16095.32 ; v1(23718.46,13933.23) 23737,13914.68 C25.1@23737,13870
+28V: C22.1 C38.2 C40.1 C59.POS J1.PC05 R30.2 R33.2 R39.2 TP18.1 U11.6 U17.13 U18.6 | length 1308.8
  Top Layer (.GTL) w5: v1(22993,13525) 23024,13556 TP18.1@23024,13606
  Top Layer (.GTL) w10: v1(23061.31,13055) 23061.31,13030 23111.31,12980 U17.13@23163.67,12980 ; U18.6@23619.46,13492.32 23619.46,13542.84 v1(23639.46,13562.84)
  Top Layer (.GTL) w20: v1(19307,12612) 19401,12612 ; J1.PC05@19391.5,12379.15 19479,12466.64 19479,12560 19427,12612 19401,12612 ; C59.POS@19403,12691.37 19403,12614 19401,12612
  Bottom Layer (.GBL) w10: C38.2@23061.31,12995 v1(23061.31,13055) ; R30.2@23365.22,13089.92 23365.22,13138.04 v1(23365.72,13138.54) ; C40.1@23639.46,13487.84 v1(23639.46,13562.84) ; v1(23640.72,12798.54) 23660.22,12818.04 U11.6@23660.22,12880.43 ; R39.2@23894.46,13497.84 v1(23894.46,13552.84) ; C22.1@23895.21,12939.92 23960.21,12874.92 R33.2@23960.21,12849.92 23960.21,12799.05 v1(23960.72,12798.54)
+CLK_100: J1.3 R11.1 U10.3 | length 1010.7
  Top Layer (.GTL) w5: J1.3@21884.5,12389.15 21884.5,12431.5 v1(21908,12455) ; v1(22584,12402) R11.1@22638.56,12402 ; R11.1@22638,12415 22655,12398 U10.3@22701,12398
  MidLayer2 (*.G2) w5: v1@21911.5,12458.5 v1(21908,12455) 21957,12504 22041,12504 22059,12522 22553,12522 22584,12491 v1(22584,12402)
-5ANA: C46.2 C47.1 C53.2 J1.PC04 TP20.1 U11.2 U18.2 | length 2742.6
  Top Layer (.GTL) w10: v1(22295,12647) TP20.1@22392,12647 ; C47.1@23425,13331 23465,13331 23473,13339 ; v1(23473,13234) 23473,13339 ; U18.2@23569.46,13303.35 23569.46,13352.54 23549,13373 23507,13373 23473,13339
  MidLayer1 (*.G1) w10: v1(22068,12440) 22088,12440 v1(22295,12647) 22511.49,12863.49 22646.18,12863.49 22797.18,13014.49 22797.18,13108 22923.18,13234 v1(23473,13234)
  Bottom Layer (.GBL) w10: v1(23473,13234) 23500.17,13206.84 23533.11,13206.84 23540.27,13214 23586,13214 23652,13148 23652,13128.78 23632,13108.78 23632,13091.19 U11.2@23610.22,13069.41
  Bottom Layer (.GBL) w20: v1(22068,12440) 22097.8,12469.8 ; C53.2@22078,12535 22078,12489.61 22097.8,12469.8 ; J1.PC04@22122.6,12379.65 22122.6,12445 22097.8,12469.8
-5VREF: R16.1 R19.1 R38.2 R40.1 R45.2 TP10.1 U14.5 | length 7086.2
  Top Layer (.GTL) w5: TP10.1@18706.96,12630 18706.96,12698.96 v1(18708,12700)
  Top Layer (.GTL) w10: U14.5@18596.47,12635 18701.97,12635 TP10.1@18706.96,12630 18731.46,12605.5 R45.2@18731.46,12535.51
  MidLayer1 (*.G1) w10: v1(23310.72,12878.54) 23401.72,12969.54 23766.72,12969.54 23875.72,13078.54 23900.72,13078.54 23925.72,13053.54 v1(23925.72,13038.54)
  MidLayer2 (*.G2) w5: v1(18708,12880) 23309.26,12880 v1(23310.72,12878.54)
  MidLayer3 (*.G3) w5: v1(18708,12700) v1(18708,12880) ; v1(23768,13981) 23821,13928 v1(23821,13244) 23822.16,13244 23882,13184.16 23882,13082.26 v1(23925.72,13038.54)
  Bottom Layer (.GBL) w5: v1(23768,13981) 23768,13954 23787,13935 R38.2@23822,13935 ; R40.1@23819.46,13302.84 23821,13301.29 v1(23821,13244)
  Bottom Layer (.GBL) w10: v1(23310.72,12878.54) 23365.21,12933.04 R16.1@23365.21,12939.92 ; R19.1@23895.22,12999.92 23895.22,13008.04 v1(23925.72,13038.54)
-12V: C11A.1 C11B.1 C11C.1 C11D.1 C11E.1 C11F.1 C27.1 C43.1 C54.2 J1.PC02 R20A.1 R20B.1 R20C.1 R20D.1 R20E.1 R20F.1 TP21.1 U8A.2 U8B.2 U8C.2 U8D.2 U8E.2 U8F.2 U12.2 U14.2 U17.4 | length 1830.4
  Top Layer (.GTL) w10: v1(18480,12512) 18496.47,12495.53 U14.2@18496.47,12446.02 ; v1(18815.2,15582.8) 18822.8,15582.8 R20A.1@18861.46,15544.13 ; v1(18999,15313) 19098,15313 TP21.1@19110,15301 ; v1(19602.61,15582.8) 19610.2,15582.8 R20B.1@19648.87,15544.13 ; v1(20390.01,15582.8) 20397.61,15582.8 R20C.1@20436.27,15544.13 ; v1(21177.41,15582.8) 21185.01,15582.8 R20D.1@21223.67,15544.13 ; v1(21964.81,15582.8) 21972.41,15582.8 R20E.1@22011.07,15544.13 ; v1(22752.21,15582.8) 22759.81,15582.8 R20F.1@22798.47,15544.13 ; v1(22873,12982) 22875,12980 U17.4@22958.95,12980 ; U12.2@23667,13680.51 23667,13611.77 v1(23668.46,13613.23)
  Bottom Layer (.GBL) w10: C43.1@18476.46,12450.51 18480,12454.04 v1(18480,12512) ; C11A.1@18497.29,15504.76 18553.12,15504.76 v1(18553.39,15505.04) ; v1(18704.97,15774.72) 18710.28,15780.04 U8A.2@18768.94,15780.04 ; C11B.1@19284.69,15504.76 19340.52,15504.76 v1(19340.79,15505.04) ; v1(19492.37,15774.72) 19497.68,15780.04 U8B.2@19556.35,15780.04 ; C11C.1@20072.09,15504.76 20127.92,15504.76 v1(20128.2,15505.04) ; v1(20279.77,15774.72) 20285.09,15780.04 U8C.2@20343.75,15780.04 ; C11D.1@20859.5,15504.76 20915.32,15504.76 v1(20915.6,15505.04) ; v1(21067.17,15774.72) 21072.49,15780.04 U8D.2@21131.15,15780.04 ; C11E.1@21646.9,15504.76 21702.73,15504.76 v1(21703,15505.04) ; v1(21854.58,15774.72) 21859.89,15780.04 U8E.2@21918.55,15780.04 ; C11F.1@22434.3,15504.76 22490.13,15504.76 v1(22490.4,15505.04) ; v1(22641.98,15774.72) 22647.29,15780.04 U8F.2@22705.95,15780.04 ; C27.1@23732,13680 23733.46,13678.54 23733.46,13633.23 v1(23758.46,13608.23)
  Bottom Layer (.GBL) w20: C54.2@22198,12540 22201.5,12536.5 22201.5,12460 ; J1.PC02@22201.5,12379.65 22201.5,12460 ; v1(22268,12465) 22206.5,12465 22201.5,12460
-CLK_100: J1.5 R11.2 U10.4 | length 1024.5
  Top Layer (.GTL) w5: J1.5@21859.5,12389.15 21859.5,12432.67 21911.84,12485 v1(21978,12485) ; v1(22579,12318) 22582,12315 R11.2@22638,12315 ; R11.2@22638,12325 22688,12325 U10.4@22701,12312
  MidLayer2 (*.G2) w5: v1(21978,12485) 22482,12485 22535,12432 22535,12362 v1(22579,12318) v1@22579,12319
A: C1A.NEG C1B.NEG C1C.NEG C1D.NEG C1E.NEG C1F.NEG C1G.NEG C1H.NEG C1I.NEG C1J.NEG C1K.NEG C1L.NEG C1M.NEG C1N.NEG C1O.NEG C3A.POS C3B.POS C3C.POS C3D.POS C3E.POS C3F.POS C3G.POS C3H.POS C3I.POS C3J.POS C3K.POS C3L.POS C3M.POS C3N.POS C3O.POS C5A.NEG C5B.NEG C5C.NEG C5D.NEG C8A.POS C8B.POS C8C.POS C8D.POS C9A.2 C9B.2 C9C.2 C9D.2 C9E.2 C9F.2 C11A.2 C11B.2 C11C.2 C11D.2 C11E.2 C11F.2 C13A.2 C13B.2 C13C.2 C13D.2 C13E.2 C13F.2 C14A.1 C14B.1 C14C.1 C14D.1 C14E.1 C14F.1 C22.2 C25.2 C27.2 C33.1 C35.1 C38.1 C40.2 C41.2 C42.1 C43.2 C44A.2 C44B.2 C44C.2 C44D.2 C44E.2 C44F.2 C45.1 C46.1 C47.2 C53.1 C54.1 C56.1 C57.2 C58.2 C59.NEG J1.PC07 P2.1 R8A.1 R8B.1 R8C.1 R8D.1 R8E.1 R8F.1 R14A.1 R14B.1 R14C.1 R14D.1 R14E.1 R14F.1 R25.1 R27.1 R29.1 R32.1 R35.2 R41.1 R44.2 TP11.1 TP12.1 TP13.1 TP14.1 U2A.3 U2B.3 U2C.3 U2D.3 U2E.3 U2F.3 U2G.3 U2H.3 U2I.3 U2J.3 U2K.3 U2L.3 U2M.3 U2N.3 U2O.3 U7A.3 U7B.3 U7C.3 U7D.3 U8A.3 U8B.3 U8C.3 U8D.3 U8E.3 U8F.3 U12.3 U13.19 U13.34 U13.36 U13.39 U13.40 U13.43 U13.44 U13.47 U13.48 U14.3 U15.4 U16.1 U16.19 U16.34 U16.36 U16.39 U16.40 U16.43 U16.45 U16.47 U17.5 U18.1 U20A.2 U20A.3 U20B.2 U20B.3 U20C.2 U20C.3 U20D.2 U20D.3 U20E.2 U20E.3 U20F.2 U20F.3 | length 12732.4
  Top Layer (.GTL) w5: v1(18265,16018) TP14.1@18362,16018 ; TP11.1@19094,15996 19158,15996 v1(19159,15997) ; TP12.1@21455,15985 v1(21529,15985) ; v1(22931,15950) 22931,15967 22971,16007 TP13.1@23019,16007 ; v1(23278,15350) 23278.74,15349.26 U16.1@23278.74,15325.02 ; U13.48@23320.22,16034.24 23320.22,16065.78 v1(23320,16066) 23335,16066 23339.9,16061.09 U13.47@23339.9,16034.24 ; U16.47@23330.91,15357.5 23330.91,15388.91 v1(23331,15389) ; v1(23370,15389) 23370.28,15388.72 U16.45@23370.28,15357.5 ; U13.44@23398.96,16034.24 23398.96,16058.96 v1(23409,16069) 23418.65,16059.36 U13.43@23418.65,16034.24 ; U16.43@23409.65,15357.5 23409.65,15389.65 v1(23410,15390) ; U16.19@23429.33,15076 23429.33,15051.67 v1(23441,15040) ; U13.19@23438.33,15752.74 23438.33,15728.67 23449,15718 v1(23449,15720) ; U16.40@23468.7,15357.5 23468.7,15382.7 v1(23476,15390) 23488.39,15377.61 U16.39@23488.39,15357.5 ; U13.40@23477.7,16034.24 23477.7,16060.7 v1(23485,16068) 23497.38,16055.61 U13.39@23497.38,16034.24 ; v1(23560,15347) 23560.24,15346.76 U16.36@23560.24,15325.02 ; U16.34@23560.24,15285.65 23590.65,15285.65 v1(23591,15286) ; v1(23569,16022) 23569.24,16021.76 U13.36@23569.24,16001.76 ; U13.34@23569.24,15962.39 23602.39,15962.39 v1(23603,15963)
  Top Layer (.GTL) w10: C42.1@18296.47,12540.51 18325.46,12511.51 18325.46,12495.74 v1(18327.46,12493.74) ; U20A.3@18439,15764 U20A.2@18402,15764 18402,15862 C44A.2@18450,15910 v1(18450,15963) ; R8A.1@18497.29,15740.28 R8A.1@18497.29,15749.41 ; R8A.1@18500.24,15752.36 R8A.1@18497.29,15749.41 ; R8A.1@18503.9,15756.02 R8A.1@18497.29,15749.41 ; U14.3@18546.47,12446.02 18546.47,12488.74 v1(18567.46,12509.74) ; v1(18585.13,13110.63) 18585.52,13110.24 U2K.3@18656.97,13110.24 ; v1(18585.13,13681.49) 18585.52,13681.1 U2F.3@18656.98,13681.1 ; v1(18585.13,14272.05) 18585.52,14271.65 U2A.3@18656.98,14271.65 ; v1(18638.04,15750.12) 18637.33,15749.41 R8A.1@18497.29,15749.41 ; v1(18955.4,14848.31) U7A.3@19028.95,14848.31 ; U15.4@18966.46,12441.02 19005.75,12441.02 v1(19006.46,12441.74) ; U20B.2@19173,15747 U20B.3@19210,15747 v1(19210,15713) ; C44B.2@19218,15893 v1(19218,15946) ; R8B.1@19284.69,15740.28 R8B.1@19284.69,15749.41 ; R8B.1@19287.65,15752.36 R8B.1@19284.69,15749.41 ; R8B.1@19291.31,15756.02 R8B.1@19284.69,15749.41 ; v1(19425.44,15750.12) 19424.73,15749.41 R8B.1@19284.69,15749.41 ; v1(19470.95,13110.63) 19471.35,13110.24 U2L.3@19542.8,13110.24 ; v1(19470.95,13681.49) 19471.35,13681.1 U2G.3@19542.8,13681.1 ; v1(19470.95,14272.05) 19471.35,14271.65 U2B.3@19542.8,14271.66 ; U20C.3@19997.4,15747 U20C.2@19960.4,15747 19960.4,15848 C44C.2@20005.4,15893 20005.4,15941.6 v1(20004,15943) ; v1(20028.24,14848.31) U7B.3@20101.78,14848.31 ; R8C.1@20072.09,15740.28 R8C.1@20072.09,15749.41 ; R8C.1@20075.05,15752.36 R8C.1@20072.09,15749.41 ; R8C.1@20078.71,15756.02 R8C.1@20072.09,15749.41 ; v1(20212.84,15750.12) 20212.13,15749.41 R8C.1@20072.09,15749.41 ; v1(20356.78,13110.63) 20357.17,13110.24 U2M.3@20428.63,13110.24 ; v1(20356.78,13681.49) 20357.17,13681.1 U2H.3@20428.63,13681.1 ; v1(20356.78,14272.05) 20357.17,14271.65 U2C.3@20428.63,14271.65 ; U20D.3@20784.8,15747 U20D.2@20747.8,15747 20747.8,15848 C44D.2@20792.8,15893 20792.8,15933.8 v1(20793,15934) ; R8D.1@20859.5,15740.28 R8D.1@20859.5,15749.41 ; R8D.1@20862.45,15752.36 R8D.1@20859.5,15749.41 ; R8D.1@20866.11,15756.02 R8D.1@20859.5,15749.41 ; v1(21000.24,15750.12) 20999.54,15749.41 R8D.1@20859.5,15749.41 ; v1(21101.07,14848.31) U7C.3@21174.62,14848.31 ; v1(21242.61,13110.63) 21243,13110.24 U2N.3@21314.46,13110.24 ; v1(21242.61,13681.49) 21243,13681.1 U2I.3@21314.46,13681.1 ; v1(21242.61,14272.05) 21243,14271.65 U2D.3@21314.46,14271.65 ; v1(21529,15985) 21529,15944.2 C44E.2@21580.2,15893 21535.2,15848 U20E.2@21535.2,15747 U20E.3@21572.2,15747 ; R8E.1@21646.9,15740.28 R8E.1@21646.9,15749.41 ; R8E.1@21649.85,15752.36 R8E.1@21646.9,15749.41 ; R8E.1@21653.51,15756.02 R8E.1@21646.9,15749.41 ; v1(21787.65,15750.12) 21786.94,15749.41 R8E.1@21646.9,15749.41 ; C58.2@22091,12789 C57.2@22204,12789 ; v1(22128.43,13110.63) 22128.83,13110.24 U2O.3@22200.28,13110.24 ; v1(22128.43,13681.49) 22128.83,13681.1 U2J.3@22200.28,13681.1 ; v1(22128.43,14272.05) 22128.83,14271.65 U2E.3@22200.28,14271.66 ; v1(22173.91,14848.31) U7D.3@22247.45,14848.31 ; C57.2@22219,12784.37 22259.63,12784.37 22281,12763 v1(22281,12731) ; U20F.3@22359.61,15747 U20F.2@22322.61,15747 22322.61,15844.73 22367.61,15889.73 22367.61,15944.61 v1(22369,15946) ; C44F.2@22367.61,15885.39 C44F.2@22367.61,15893 ; R8F.1@22431.89,15747 R8F.1@22434.3,15749.41 ; R8F.1@22434.3,15740.28 R8F.1@22434.3,15749.41 ; R8F.1@22437.25,15752.36 R8F.1@22434.3,15749.41 ; R8F.1@22440.91,15756.02 R8F.1@22434.3,15749.41 ; v1(22575.05,15750.12) 22574.34,15749.41 R8F.1@22434.3,15749.41 ; U17.5@22958.95,12930 23018.31,12930 23062.31,12886 v1(23062.31,12849) ; v1(23331,13287) 23331,13327 C47.2@23335,13331 ; v1(23519.46,13227.84) U18.1@23519.46,13303.35 ; v1(23610.72,13143.54) 23640.72,13143.54 23650.22,13134.04 ; v1(23613.46,13603.23) v1@23617,13606.77 ; R32.1@23650.22,13084.92 23650.22,13134.04 ; C45.1@23657,13189 23650.22,13182.22 23650.22,13134.04 ; U12.3@23717,13680.51 23717,13712.57 23751.43,13747 v1(23768,13747)
  Top Layer (.GTL) w20: J1.PC07@19312.6,12379.15 19312.6,12490.6 v1(19313,12491) ; v1(19324,12842) 19324,12842.37 C59.NEG@19403,12921.37 ; C56.1@23009,13797 23109,13797 P2.1@23111,13795
  Bottom Layer (.GBL) w5: C35.1@23500,14992.26 23500,14950.26 v1(23501,14949.26) ; C33.1@23509,15679 23512,15676 v1(23512,15634)
  Bottom Layer (.GBL) w10: v1(18464.46,12570.74) 18476.46,12582.74 C41.2@18476.46,12630.51 ; v1(18471.94,13271.06) 18471.94,13304.54 C1K.NEG@18507.37,13339.98 ; v1(18471.94,13841.93) 18471.94,13875.41 C1F.NEG@18507.37,13910.84 ; v1(18471.94,14432.48) 18471.94,14465.96 C1A.NEG@18507.37,14501.39 ; v1(18490.4,15038.31) 18494.4,15038.31 C8A.POS@18555.4,15099.31 ; C11A.2@18497.29,15414.76 18547.84,15414.76 18548.47,15414.13 v1(18548.47,15413.5) ; C43.2@18566.46,12450.51 18566.46,12508.74 v1(18567.46,12509.74) ; v1(18629.18,15922.36) 18629.3,15922.48 C13A.2@18629.3,15961.73 ; v1(18705.95,15739.29) 18715.2,15730.04 U8A.3@18768.94,15730.04 ; C14A.1@18739.3,15548.35 18797.49,15548.35 v1(18798.47,15547.36) ; v1(18804.1,16005.32) C9A.2@18871.31,16005.32 ; v1(18819.14,15868.23) 18822.8,15868.23 R14A.1@18862.88,15828.15 R14A.1@18860.48,15830.55 ; v1(18929.61,13338.98) 18930.61,13339.98 C3K.POS@18999.5,13339.98 ; v1(18929.61,13909.84) 18930.61,13910.84 C3F.POS@18999.5,13910.84 ; v1(18929.61,14500.39) 18930.61,14501.39 C3A.POS@18999.5,14501.39 ; v1(18955.4,14848.31) 19054.4,14848.31 C5A.NEG@19055.4,14847.31 ; C11B.2@19284.69,15414.76 19335.24,15414.76 19335.87,15414.13 v1(19335.87,15413.5) ; v1(19357.76,13271.06) 19357.76,13304.54 C1L.NEG@19393.2,13339.98 ; v1(19357.76,13841.93) 19357.76,13875.41 C1G.NEG@19393.2,13910.84 ; v1(19357.76,14432.48) 19357.76,14465.96 C1B.NEG@19393.2,14501.39 ; v1(19416.58,15922.36) 19416.7,15922.48 C13B.2@19416.7,15961.73 ; v1(19493.35,15739.29) 19502.61,15730.04 U8B.3@19556.35,15730.04 ; C14B.1@19526.7,15548.35 19584.89,15548.35 v1(19585.87,15547.36) ; v1(19563.24,15038.31) 19567.24,15038.31 C8B.POS@19628.24,15099.31 ; v1(19591.5,16005.32) C9B.2@19658.71,16005.32 ; v1(19606.54,15868.23) 19610.2,15868.23 R14B.1@19650.28,15828.15 R14B.1@19647.88,15830.55 ; v1(19815.44,13338.98) 19816.44,13339.98 C3L.POS@19885.32,13339.98 ; v1(19815.44,13909.84) 19816.44,13910.84 C3G.POS@19885.32,13910.84 ; v1(19815.44,14500.39) 19816.44,14501.39 C3B.POS@19885.32,14501.39 ; v1(20028.24,14848.31) 20127.24,14848.31 C5B.NEG@20128.24,14847.31 ; C11C.2@20072.09,15414.76 20122.64,15414.76 20123.28,15414.13 v1(20123.28,15413.5) ; v1(20203.98,15922.36) 20204.1,15922.48 C13C.2@20204.1,15961.73 ; v1(20243.59,13271.06) 20243.59,13304.54 C1M.NEG@20279.02,13339.98 ; v1(20243.59,13841.93) 20243.59,13875.41 C1H.NEG@20279.02,13910.84 ; v1(20243.59,14432.48) 20243.59,14465.96 C1C.NEG@20279.02,14501.39 ; v1(20280.76,15739.29) 20290.01,15730.04 U8C.3@20343.75,15730.04 ; C14C.1@20314.1,15548.35 20372.29,15548.35 v1(20373.28,15547.36) ; v1(20378.91,16005.32) C9C.2@20446.11,16005.32 ; v1(20393.94,15868.23) 20397.6,15868.23 R14C.1@20437.68,15828.15 R14C.1@20435.28,15830.55 ; v1(20636.07,15038.31) 20640.07,15038.31 C8C.POS@20701.07,15099.31 ; v1(20701.27,13338.98) 20702.27,13339.98 C3M.POS@20771.15,13339.98 ; v1(20701.27,13909.84) 20702.27,13910.84 C3H.POS@20771.15,13910.84 ; v1(20701.27,14500.39) 20702.27,14501.39 C3C.POS@20771.15,14501.39 ; C11D.2@20859.5,15414.76 20910.04,15414.76 20910.68,15414.13 v1(20910.68,15413.5) ; v1(20991.39,15922.36) 20991.5,15922.48 C13D.2@20991.5,15961.73 ; v1(21068.16,15739.29) 21077.41,15730.04 U8D.3@21131.15,15730.04 ; v1(21101.07,14848.31) 21200.07,14848.31 C5C.NEG@21201.07,14847.31 ; C14D.1@21101.5,15548.35 21159.69,15548.35 v1(21160.68,15547.36) ; v1(21129.42,13271.06) 21129.42,13304.54 C1N.NEG@21164.85,13339.98 ; v1(21129.42,13841.93) 21129.42,13875.41 C1I.NEG@21164.85,13910.84 ; v1(21129.42,14432.48) 21129.42,14465.96 C1D.NEG@21164.85,14501.39 ; v1(21166.31,16005.32) C9D.2@21233.51,16005.32 ; v1(21181.35,15868.23) 21185.01,15868.23 R14D.1@21225.08,15828.15 R14D.1@21222.69,15830.55 ; v1(21587.09,13338.98) 21588.09,13339.98 C3N.POS@21656.98,13339.98 ; v1(21587.09,13909.84) 21588.09,13910.84 C3I.POS@21656.98,13910.84 ; v1(21587.09,14500.39) 21588.09,14501.39 C3D.POS@21656.98,14501.39 ; C11E.2@21646.9,15414.76 21697.45,15414.76 21698.08,15414.13 v1(21698.08,15413.5) ; v1(21708.91,15038.31) 21712.91,15038.31 C8D.POS@21773.91,15099.31 ; v1(21778.79,15922.36) 21778.91,15922.48 C13E.2@21778.91,15961.73 ; v1(21855.56,15739.29) 21864.81,15730.04 U8E.3@21918.55,15730.04 ; C14E.1@21888.91,15548.35 21947.1,15548.35 v1(21948.08,15547.36) ; v1(21953.71,16005.32) C9E.2@22020.91,16005.32 ; v1(21968.75,15868.23) 21972.41,15868.23 R14E.1@22012.49,15828.15 R14E.1@22010.09,15830.55 ; v1(22015.24,13271.06) 22015.24,13304.54 C1O.NEG@22050.68,13339.98 ; v1(22015.24,13841.93) 22015.24,13875.41 C1J.NEG@22050.68,13910.84 ; v1(22015.24,14432.48) 22015.24,14465.96 C1E.NEG@22050.68,14501.39 ; v1(22173.91,14848.31) 22272.91,14848.31 C5D.NEG@22273.91,14847.31 ; C11F.2@22434.3,15414.76 22484.85,15414.76 22485.48,15414.13 v1(22485.48,15413.5) ; v1(22472.92,13338.98) 22473.92,13339.98 C3O.POS@22542.8,13339.98 ; v1(22472.92,13909.84) 22473.92,13910.84 C3J.POS@22542.8,13910.84 ; v1(22472.92,14500.39) 22473.92,14501.39 C3E.POS@22542.8,14501.39 ; v1(22566.19,15922.36) 22566.31,15922.48 C13F.2@22566.31,15961.73 ; v1(22642.96,15739.29) 22652.21,15730.04 U8F.3@22705.95,15730.04 ; C14F.1@22676.31,15548.35 22734.5,15548.35 v1(22735.48,15547.36) ; v1(22741.11,16005.32) C9F.2@22808.31,16005.32 ; v1(22756.15,15868.23) 22759.81,15868.23 R14F.1@22799.89,15828.15 R14F.1@22797.49,15830.55 ; C38.1@23061.31,12905 23062.31,12904 v1(23062.31,12849) ; v1(23484.46,13487.84) C40.2@23549.46,13487.84 ; R29.1@23494.19,13089.92 23507.61,13089.92 23539.4,13121.72 23588.89,13121.72 ; v1(23519.46,13227.84) 23549.46,13257.84 R41.1@23549.46,13337.84 ; 23562,13122.72 C46.1@23562,13173 ; v1(23578.46,13868.23) 23580.23,13870 C25.2@23647,13870 ; v1(23610.72,13143.54) 23588.89,13121.72 ; v1(23613.46,13603.23) 23642,13631.77 C27.2@23642,13680 ; R27.1@23765.22,12999.92 23762.49,12999.92 23732.11,12969.54 23645.72,12969.54 23588.89,13026.37 23588.89,13121.72 ; v1(23768,13747) 23784,13747 R25.1@23812,13775 ; R35.2@23830.21,12849.92 C22.2@23895.21,12849.92 ; R44.2@23894.46,13342.83 v1(23939.46,13342.84) ; C22.2@23895.72,12849.42 C22.2@23895.21,12849.92 ; v1(23925.72,12801.54) 23895.21,12832.05 C22.2@23895.21,12849.92
  Bottom Layer (.GBL) w20: C53.1@22078,12645 22193,12645 C54.1@22198,12650 22249,12650 v1(22263,12664)
  other v1: 23925.72,12801.54
BIAS_V_ON: U9.26 U17.1 U17.8 U17.9 U17.16 | length 1700
  Top Layer (.GTL) w5: U9.26@23016.19,14064.37 23016.19,13980.81 v1(23028,13969)
  Top Layer (.GTL) w10: U17.8@22958.95,12780 v1(23029.31,12780) U17.9@23163.67,12780 ; U17.1@22958.95,13130 v1(23026.31,13130) v1(23028,13130) U17.16@23163.67,13130
  MidLayer3 (*.G3) w5: v1(23028,13130) v1(23028,13969)
  Bottom Layer (.GBL) w10: v1(23026.31,13130) 23027.31,13129 23027.31,12782 v1(23029.31,12780)
CDO1: J1.149 R2F.2 | length 2839.7
  Top Layer (.GTL) w10: J1.149@19679,12388.09 19679,12447 v1(19680,12448)
  MidLayer2 (*.G2) w10: v1(18343,13565) v1@18633,13565 ; v1(18351,12902) v1(19008,12902) ; v1@18633,13558.87 v1(18633,13560.87) ; v1(19048,12621) 19061,12634 19624,12634 19636,12622 v1(19680,12622)
  MidLayer3 (*.G3) w10: v1(18343,13565) 18343,12910 v1(18351,12902) ; v1(19008,12902) 19008,12661 v1(19048,12621) ; v1(19680,12448) v1(19680,12622)
  Bottom Layer (.GBL) w10: v1@18635.32,13563.19 R2F.2@18635.32,13611.89 ; v1@19679,12621 v1(19680,12622)
CDO2: J1.139 R2G.2 | length 2098
  Top Layer (.GTL) w10: J1.139@19804,12388.09 v1(19804,12449)
  MidLayer2 (*.G2) w10: v1(19228,12745) v1(19803,12745) ; v1(19228,13570) v1@19518,13570 ; v1@19518.83,13558.87 v1(19518.83,13560.87)
  MidLayer3 (*.G3) w10: v1(19228,12745) v1(19228,13570) ; v1(19803,12745) 19803,12728 19804,12727 v1(19804,12449)
  Bottom Layer (.GBL) w10: v1@19521.15,13563.19 R2G.2@19521.15,13611.89
CDO3: J1.129 R2H.2 | length 1703.4
  Top Layer (.GTL) w10: J1.129@19929,12388.09 v1@19929,12449
  MidLayer2 (*.G2) w10: v1(19929,12801) 19930,12802 v1(20122,12802) ; v1(20123,13565) v1@20408,13565 ; v1@20404.65,13558.87 v1(20404.65,13560.87)
  MidLayer3 (*.G3) w10: v1(19928,12450) v1@19928,12800 ; v1(20122,12802) 20123,12803 v1(20123,13565)
  Bottom Layer (.GBL) w10: v1@20406.98,13563.19 R2H.2@20406.98,13611.89
CDO4: J1.119 R2I.2 | length 2465.9
  Top Layer (.GTL) w10: v1(20053,12450) 20054,12449 J1.119@20054,12388.09
  MidLayer2 (*.G2) w10: v1(20055,12679) v1(21022,12679) ; v1(21023,13565) v1@21293,13565 ; v1@21290.48,13558.87 v1(21290.48,13560.87)
  MidLayer3 (*.G3) w10: v1(20053,12450) 20053,12677 v1(20055,12679) ; v1(21022,12679) v1(21023,13565)
  Bottom Layer (.GBL) w10: v1@21292.8,13563.19 R2I.2@21292.8,13611.89
CDO5: J1.112 R2J.2 | length 3249.6
  MidLayer2 (*.G2) w10: v1(20154,12571) 21664,12571 v1(21861,12571) ; v1(21863,13565) v1@22178,13565 ; v1@22176.31,13558.87 v1(22176.31,13560.87)
  MidLayer3 (*.G3) w10: v1(20154,12492) v1(20154,12571) ; v1(21861,12571) v1(21863,13565)
  Bottom Layer (.GBL) w10: J1.112@20154,12388.09 v1(20154,12492) ; v1@22178.63,13563.19 R2J.2@22178.63,13611.89
  other v1: 20154,12492
CDO6: J1.148 R2K.2 | length 1679.8
  MidLayer2 (*.G2) w10: v1(18633,12990) 18633,12988 18691,12930 19058,12930 v1(19068,12920) ; v1(19068,12655) v1(19703,12655)
  MidLayer3 (*.G3) w10: v1(19068,12655) v1(19068,12920) ; 19703,12642 v1(19703,12655) ; v1(19704,12485) 19704,12641
  Bottom Layer (.GBL) w10: v1@18635.32,12992.32 R2K.2@18635.32,13041.02 ; J1.148@19704,12388.09 v1(19704,12485)
CDO7: J1.138 R2L.2 | length 963
  MidLayer2 (*.G2) w10: v1(19518,12777) v1(19828,12777) ; v1@19518.83,12988 v1(19518.83,12990)
  MidLayer3 (*.G3) w10: v1(19518,12777) v1@19518,12990 ; v1(19828,12490) v1(19828,12777)
  Bottom Layer (.GBL) w10: v1@19521.15,12992.32 R2L.2@19521.15,13041.02 ; v1(19828,12490) 19829,12489 J1.138@19829,12388.09
CDO8: J1.128 R2M.2 | length 1103.4
  MidLayer2 (*.G2) w10: v1(19954,12768) 19956,12770 v1(20408,12770) ; v1@20404.65,12988 v1(20404.65,12990)
  MidLayer3 (*.G3) w10: v1(19953,12490) v1@19953,12767 ; v1(20408,12770) v1@20408,12990
  Bottom Layer (.GBL) w10: J1.128@19954,12388.09 v1@19954,12489 ; v1@20406.98,12992.32 R2M.2@20406.98,13041.02
CDO9: J1.118 R2N.2 | length 1865.9
  MidLayer2 (*.G2) w10: v1@20080,12648 v1(21293,12648) ; v1@21290.48,12988 v1(21290.48,12990)
  MidLayer3 (*.G3) w10: v1(20078,12495) 20078,12645 v1(20080,12647) ; v1(21293,12648) v1@21293,12990
  Bottom Layer (.GBL) w10: v1(20078,12495) 20079,12494 J1.118@20079,12388.09 ; v1@21292.8,12992.32 R2N.2@21292.8,13041.02
CDO10: J1.113 R2E.2 | length 3863.1
  Top Layer (.GTL) w10: v1(20128,12450) 20129,12449 J1.113@20129,12388.09
  MidLayer2 (*.G2) w10: v1@20128,12611 v1(21788,12611) ; v1(21793,14155) v1@22178,14155 ; v1@22176.31,14149.42 v1(22176.31,14151.42)
  MidLayer3 (*.G3) w10: v1(20128,12450) v1(20128,12609) ; v1(21788,12611) 21788,14150 v1(21793,14155)
  Bottom Layer (.GBL) w10: v1@22178.63,14153.74 R2E.2@22178.63,14202.44
CDO11: J1.109 R2O.2 | length 2653.9
  Top Layer (.GTL) w10: J1.109@20179,12388.09 v1@20179,12449
  MidLayer2 (*.G2) w10: v1@20182,12533 v1(20178,12529) v1@21923,12529 ; v1(21933,12990) v1@22183,12990 ; v1@22176.31,12988 v1(22176.31,12990)
  MidLayer3 (*.G3) w10: v1(20178,12450) v1(20178,12529) v1@20182,12533 ; v1(21933,12533) v1(21933,12990)
  Bottom Layer (.GBL) w10: v1@22178.63,12992.32 R2O.2@22178.63,13041.02
CDO12: J1.152 R2A.2 | length 3588.1
  MidLayer2 (*.G2) w10: v1(18288,12841) 18300,12829 18958,12829 v1(18969,12840) ; v1(18288,14155) v1@18633,14155 ; v1@18633,14149.42 v1(18633,14151.42) ; v1(18969,12555) 18992.5,12578.5 19643.5,12578.5 v1(19655,12590)
  MidLayer3 (*.G3) w10: v1(18288,12841) v1(18288,14155) ; v1(18969,12555) v1(18969,12840) ; v1(19654,12483) 19654,12589 v1(19655,12590)
  Bottom Layer (.GBL) w10: v1@18635.32,14153.74 R2A.2@18635.32,14202.44 ; J1.152@19654,12388.09 v1(19654,12483)
CDO13: J1.142 R2B.2 | length 2780
  MidLayer2 (*.G2) w10: v1(19163,14150) v1@19518,14150 ; v1(19166,12714) v1(19778,12714) ; v1@19518.83,14149.42 v1(19518.83,14151.42)
  MidLayer3 (*.G3) w10: v1(19163,14150) v1(19166,12714) ; v1(19778,12489) v1(19778,12714)
  Bottom Layer (.GBL) w10: v1@19521.15,14153.74 R2B.2@19521.15,14202.44 ; v1(19778,12489) 19779,12488 J1.142@19779,12388.09
CDO14: J1.132 R2C.2 | length 2317.7
  MidLayer2 (*.G2) w10: v1@19906,12834 v1(19904,12832) 20050,12832 v1(20052,12834) ; v1(20053,14155) v1@20403,14155 ; v1@20404.65,14149.42 v1(20404.65,14151.42)
  MidLayer3 (*.G3) w10: v1(19904,12491) v1(19904,12832) ; v1(20052,12834) 20053,12835 v1(20053,14155)
  Bottom Layer (.GBL) w10: J1.132@19904,12388.09 v1(19904,12491) ; v1@20406.98,14153.74 R2C.2@20406.98,14202.44
CDO15: J1.122 R2D.2 | length 3087.9
  MidLayer2 (*.G2) w10: v1(20028,12711) v1@20030,12713 ; v1@20030,12712 v1(20948,12712) ; v1(20948,14160) v1@21293,14160 ; v1@21290.48,14149.42 v1(21290.48,14151.42)
  MidLayer3 (*.G3) w10: v1(20028,12494) v1(20028,12711) ; v1(20948,12712) v1(20948,14160)
  Bottom Layer (.GBL) w10: v1(20028,12494) 20029,12493 J1.122@20029,12388.09 ; v1@21292.8,14153.74 R2D.2@21292.8,14202.44
CDO16: J1.153 R4A.2 | length 4109.7
  Top Layer (.GTL) w10: v1(18488,14755) 18510.4,14777.4 R4A.2@18510.4,14803.31 ; J1.153@19629,12388.09 19629,12445 v1(19630,12446)
  MidLayer2 (*.G2) w10: v1(18233,12797) v1(18936,12797) ; v1(18233,14755) v1(18488,14755) ; v1(18938,12523) 18941,12526 19002,12526 19023,12547 v1(19630,12547)
  MidLayer3 (*.G3) w10: v1(18233,12797) v1(18233,14755) ; v1(18936,12797) 18938,12795 v1(18938,12523) ; v1(19630,12446) v1(19630,12547)
CDO17: J1.143 R4B.2 | length 3495.5
  Top Layer (.GTL) w10: v1(19560.83,14755) 19583.24,14777.4 R4B.2@19583.24,14803.31 ; J1.143@19754,12388.09 v1(19754,12448)
  MidLayer2 (*.G2) w10: v1(19108,14710) 19523,14710 v1@19563,14750 ; v1(19111,12683) 19713,12683 19714,12684 v1(19754,12684)
  MidLayer3 (*.G3) w10: v1(19108,14710) v1(19111,12683) ; v1(19754,12448) v1(19754,12684)
CDO18: J1.133 R4C.2 | length 3114.6
  Top Layer (.GTL) w10: J1.133@19879,12388.09 v1(19879,12446) ; v1(20633.67,14755) 20656.07,14777.4 R4C.2@20656.07,14803.31
  MidLayer2 (*.G2) w10: v1(19988,14750) v1@20638,14750
  MidLayer3 (*.G3) w10: v1(19879,12446) 19879,12852 19879,12887 19988,12996 v1(19988,14750)